# Altium PCB MICROPRESSURE.PcbDoc (part 2 of 2)
Units mm, origin at the board's own origin, x right, y up, seen from the top; angles counter-clockwise.
Board outline 100.09 x 99.96 mm, 2 copper layers (Top Layer, Bottom Layer), stack 1.58 mm thick; 120 components, 61 nets, 315 pads, 444 vias.
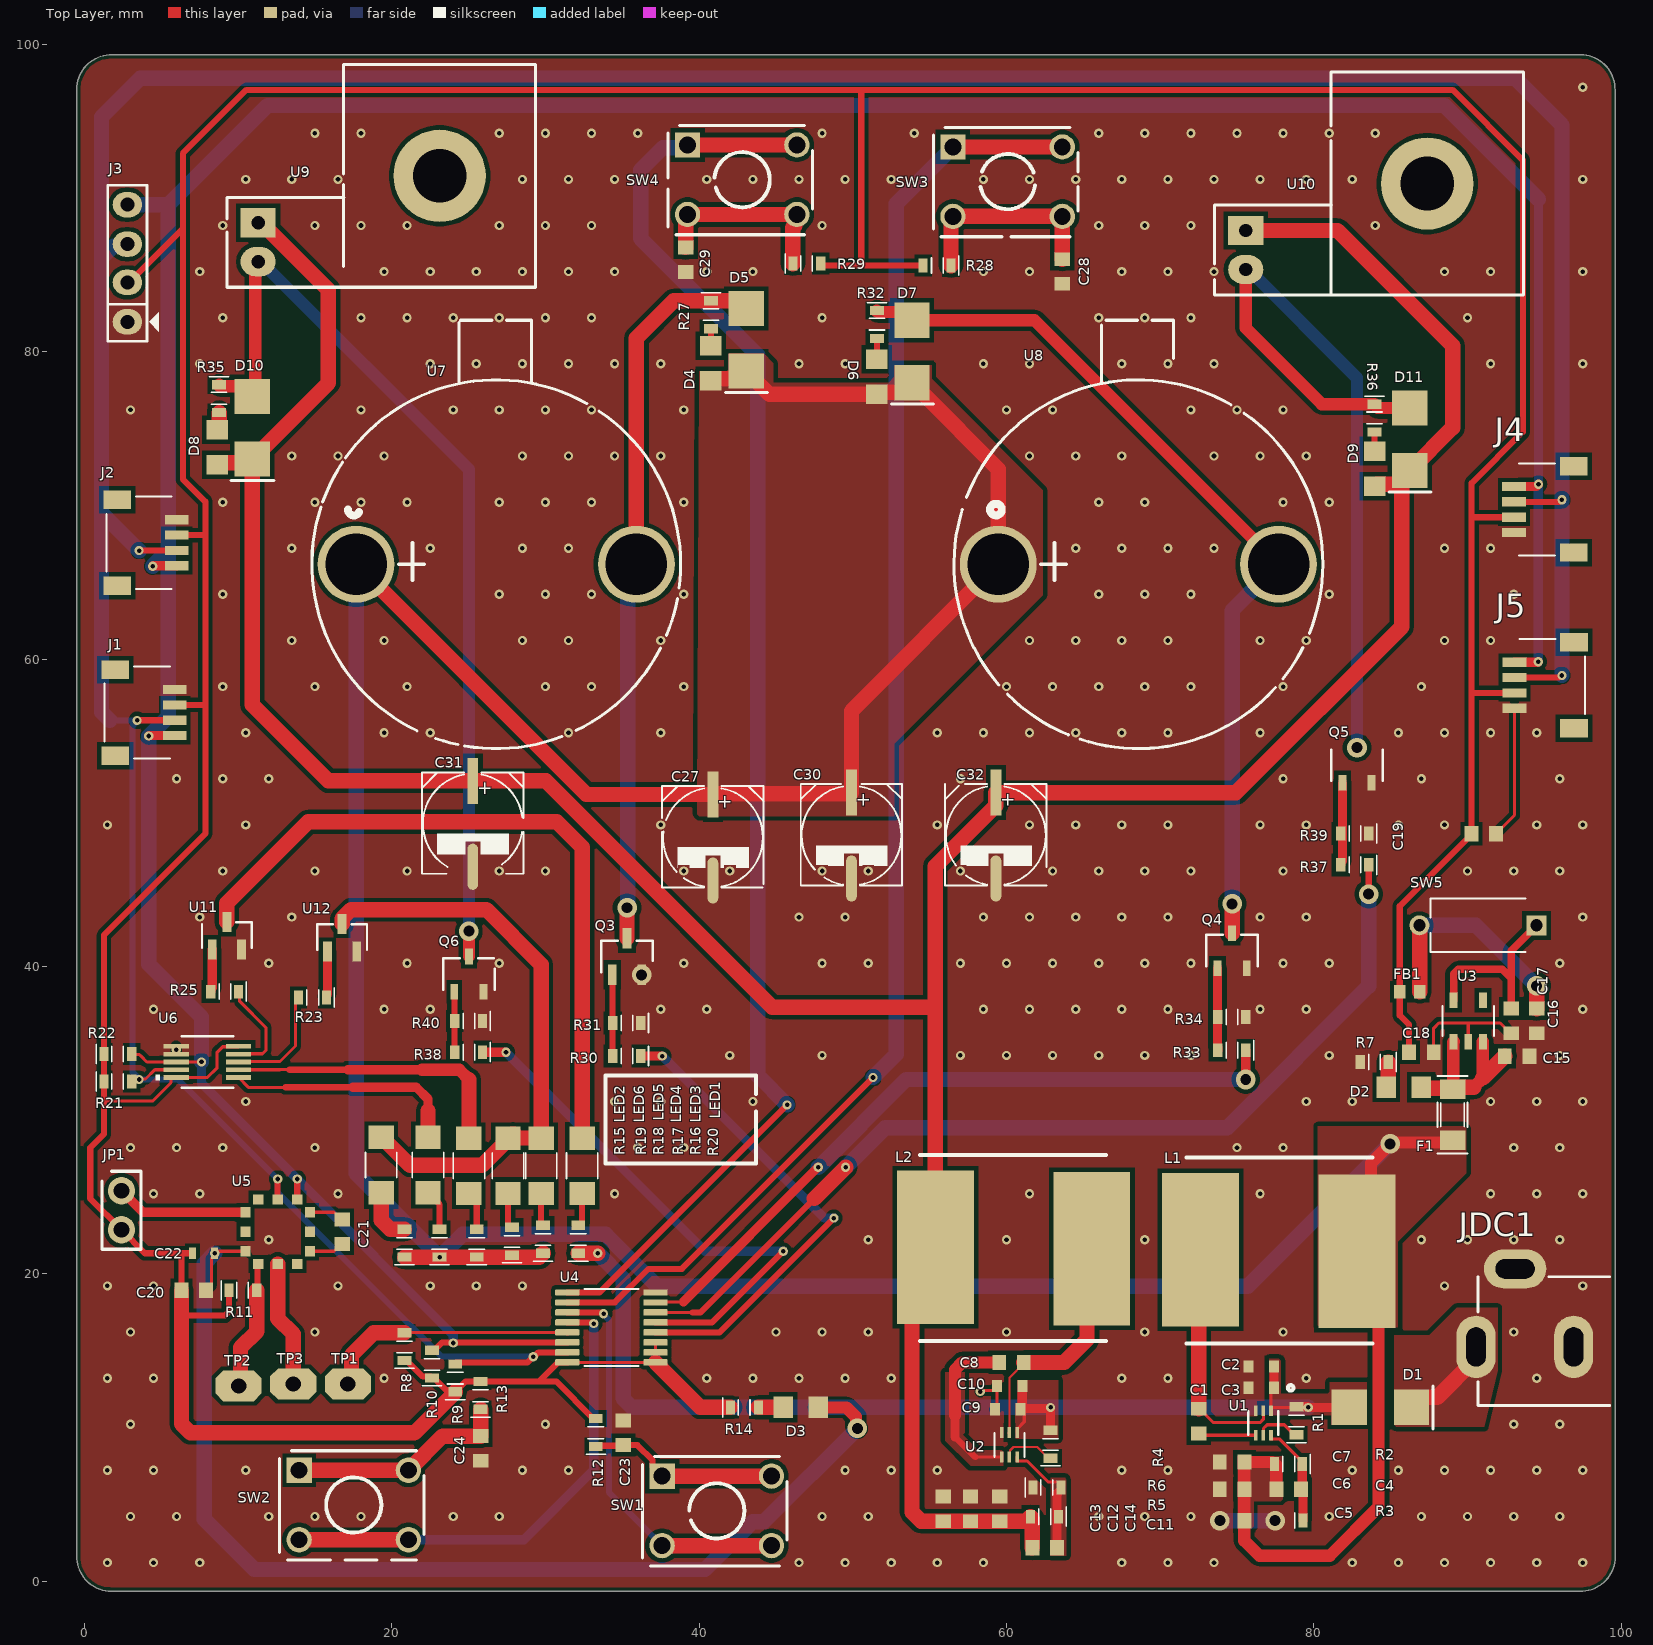
[diagram p0: Top Layer view]

## Via types
v1: diameter 0.6, hole 0.3, Top Layer to Bottom Layer, 432 vias
v2: diameter 1.27, hole 0.711, Top Layer to Bottom Layer, 12 vias

## Nets (pads, with @x,y where several pads share a name; then routed paths per layer and width w, separated by ;. In a path a pad name is that pad's centre, name@x,y a point inside that pad or via, vN(x,y) a via of type N, cw(c..) or ccw(c..) an arc to the next point about the centre after c; other vN are vias at no path point) (continued)
NetR33_1: (continued)
  Top Layer w0.6: 38.976,18.18 47.72,26.924 v1(47.752,26.924) ; v2(75.565,32.639) R33.1
  Bottom Layer w1: v1(47.752,26.924) 53.467,32.639 v2(75.565,32.639)
NetR37_1: R37.1 U4.6 | length 63.1
  Top Layer w0.2: U4.6 39.583,17.485
  Top Layer w0.4: 39.583,17.485 40.091,17.485 47.498,24.892 ; v2(83.566,44.704) R37.1
  Top Layer w1: 47.498,24.892 v1(49.53,26.924)
  Bottom Layer w1: v1(49.53,26.924) 52.105,29.499 74.355,29.499 83.566,38.71 v2(83.566,44.704)
NetR38_1: R38.1 U4.5 | length 35.1
  Top Layer w0.4: U4.5 40.838,16.835 v1(45.466,21.463)
  Top Layer w0.6: R38.1 v1(27.432,34.417)
  Bottom Layer w0.6: v1(27.432,34.417) 40.386,21.463 v1(45.466,21.463)
NetTP3_1: TP3.1 U5.8 | length 8.2
  Top Layer w1: U5.8 12.573,17.092 13.589,16.076 TP3.1
PUMP1_IN: C23.2 R12.1 SW1.1 SW1.2 U4.11 | length 38.7
  Top Layer w0.4: U4.11 33.642,17.485 33.728,17.399 v1(33.782,17.399) ; R12.1 33.319,8.807 35.007,8.807 C23.2 35.979,8.852 36.966,7.865 36.966,7.458 SW1.1@37.592,6.833
  Top Layer w1: SW1.2@37.592,2.311 SW1.2@44.704,2.311 ; SW1.1@37.592,6.833 SW1.1@44.704,6.833
  Bottom Layer w0.4: v1(33.782,17.399) 33.782,17.345 34.122,17.005 34.122,5.781 SW1.2@37.592,2.311
PUMP2_IN: C24.2 R13.1 SW2.1 SW2.2 U4.12 | length 46.8
  Top Layer w0.4: U4.12 33.013,16.835 33.093,16.755 v1(33.147,16.755)
  Top Layer w1: SW2.2@13.97,2.692 SW2.2@21.082,2.692 ; SW2.1@13.97,7.214 21.082,7.214 23.304,9.436 C24.2 R13.1
  Bottom Layer w0.6: SW2.2@21.082,2.692 28.6,2.692 33.147,7.239 v1(33.147,16.755)
RES: R11.2 TP2.1 U5.9 | length 8.5
  Top Layer w0.4: R11.2 11.258,18.968 11.258,20.588 U5.9
  Top Layer w1: TP2.1 10.158,12.825 10.158,15.2 11.214,16.256 R11.2
SCL: J1.4 J2.4 J3.4 J4.4 J5.4 R10.2 R22.2 U4.14 U5.3 U6.8 | length 232.7
  Top Layer w0.2: R22.2 3.117,34.259 3.587,34.259 3.668,34.178 4.064,33.782 U6.8 v1(7.62,33.782)
  Top Layer w0.4: U5.3 v1(13.843,26.162) ; R10.2 22.756,15.024 23.267,15.535 U4.14
  Top Layer w0.6: v1(4.191,54.991) 4.215,55.015 J1.4 ; v1(4.445,66.04) 4.469,66.064 J2.4 ; J5.4 94.577,59.793 v1(94.601,59.817) ; J4.4@93.308,71.229 94.47,71.229 v1(94.615,71.374)
  Bottom Layer w0.6: v1(7.62,33.782) 7.62,32.385 v1(13.843,26.162) 24.003,16.002 v1(24.003,15.494) ; v1(94.601,59.817) 94.601,71.36 v1(94.615,71.374) 94.615,89.916
  Bottom Layer w1: J3.4 5.461,89.56 ; v1(4.445,66.04) 5.461,67.056 ; v1(7.62,33.782) 7.62,36.703 4.191,40.132 v1(4.191,54.991) 5.461,56.261 5.461,67.056 ; 94.615,89.916 88.513,96.018 11.919,96.018 5.461,89.56 ; 5.461,67.056 5.461,89.56
SDA: J1.3 J2.3 J3.3 J4.3 J5.3 R9.2 R21.2 U4.15 U5.2 U6.9 | length 260.3
  Top Layer w0.2: R21.2 3.213,32.639 v1(3.556,32.639) 3.584,32.667 3.977,32.667 4.584,33.274 U6.9
  Top Layer w0.4: v1(3.429,56.007) 3.433,56.011 5.875,56.011 J1.3 ; v1(3.556,67.056) 3.56,67.06 6.002,67.06 J2.3 ; U5.2 v1(12.573,26.162) ; R9.2 24.23,14.235 28.84,14.235 v1(29.21,14.605) 29.264,14.605 29.544,14.885 U4.15 ; J5.3 93.058,58.797 95.954,58.797 96.085,58.928 v1(96.139,58.928) ; J4.3@93.312,70.227 95.954,70.227 96.085,70.358 v1(96.139,70.358)
  Bottom Layer w0.4: 1.651,56.007 v1(3.429,56.007) 3.429,55.953 3.134,55.658 3.134,33.115 3.556,32.693 v1(3.556,32.639) 6.096,32.639 v1(12.573,26.162) 12.573,25.273 23.241,14.605 v1(29.21,14.605)
  Bottom Layer w1: 1.651,56.007 1.111,56.547 1.111,69.501 ; J3.3 2.669,86.87 1.892,86.87 1.111,86.09 ; v1(3.556,67.056) 1.111,69.501 ; v1(96.139,58.928) v1(96.139,70.358) 96.139,94.742 93.091,97.79 3.634,97.79 1.111,95.268 1.111,86.09 ; 1.111,69.501 1.111,86.09
VALVE1_IN: C29.2 R29.1 SW4.1 SW4.2 U4.9 | length 107.6
  Top Layer w0.4: U4.9 33.517,18.785 v1(45.72,30.988)
  Top Layer w1: C29.2 39.118,86.781 39.118,88.801 39.243,88.925 46.355,88.925 46.23,88.801 46.23,88.198 46.101,88.068 R29.1 ; SW4.1@39.243,93.447 SW4.1@46.355,93.447
  Bottom Layer w1: SW4.1@39.243,93.447 39.068,93.272 37.646,93.272 36.195,91.821 36.195,87.376 43.815,79.756 43.815,32.893 v1(45.72,30.988)
VALVE2_IN: C28.2 R28.1 SW3.1 SW3.2 U4.10 | length 108.9
  Top Layer w0.4: U4.10 34.518,18.135 36.703,20.32 38.862,20.32 v1(51.308,32.766)
  Top Layer w1: R28.1 56.388,86.495 56.39,86.498 56.39,88.674 56.515,88.798 63.627,88.798 C28.2 ; SW3.1@56.515,93.32 SW3.1@63.627,93.32
  Bottom Layer w1: v1(51.308,32.766) 52.832,34.29 52.832,89.637 SW3.1@56.515,93.32
VIN: C2.2 C3.2 C9.2 C10.2 D1.2 R1.2 R4.2 R20.1 U1.1 U2.1 | length 71
  Top Layer w0.2: U2.1 60.69,9.899 61.153,10.362 C9.2@61.153,11.176 ; U1.1 77.208,12.372 C3.2 ; U1.1@77.223,11.303 R1.2@79.055,11.303
  Top Layer w0.6: C9.2 60.899,11.248 61.026,11.375 C10.2 ; C9.2@61.153,11.212 61.181,11.239 62.801,11.239 v1(62.865,11.303) R4.2 ; C3.2 C2.2 ; R1.2 79.591,11.341 v1(79.629,11.303) ; v1@79.591,11.303 v1(79.629,11.303) ; D1.2 v1(79.629,11.303)
  Top Layer w1: R20.1 v1(33.401,21.336)
  Bottom Layer w1: v1(33.401,21.336) 35.052,19.685 35.052,11.889 35.638,11.303 v1(62.865,11.303) v1(79.629,11.303)
pads on no net: J1.S1 J1.S2 J2.S1 J2.S2 J4.S1 J4.S2 J5.S1 J5.S2 U3.4 U5.1 U5.5 U5.7 U5.11 U9.3 U10.3

## Polygon pours and split planes (outlines as drawn)
GND on Top Layer "GND_L01_P008" (solid, remove dead copper, pour order 8): 0,102.489 0.635,101.854 103.124,101.854 103.124,-5.461 102.235,-6.35 101.854,-5.969 -5.334,-5.969 -5.334,99.06 -3.175,101.219
4V5 on Top Layer "4V5_L01_P007" (solid, remove dead copper, pour order 7): 40.005,78.74 41.783,78.74 41.91,78.867 41.91,79.883 44.196,79.883 44.831,79.248 44.831,77.978 52.324,77.978 52.705,78.359 52.705,79.248 52.832,79.121 55.118,79.121 55.118,78.232 62.357,70.993 62.357,64.135 52.705,54.483 52.705,49.784 40.005,49.784 39.878,49.911
NetC11_1 on Top Layer "NETC11_1_L01_P006" (solid, remove dead copper, pour order 6): 62.865,1.651 62.865,1.766 62.865,1.905 62.865,6.731 64.008,6.731 63.881,6.604 63.881,1.651
NetC8_2 on Top Layer "NETC8_2_L01_P005" (solid, remove dead copper, pour order 5): 59.817,8.382 59.69,8.509 58.166,8.509 57.15,9.525 57.277,9.652 57.277,13.589 56.007,13.589 56.007,9.144 57.658,7.493 59.817,7.493
4V5 on Top Layer "4V5_L01_P004" (solid, remove dead copper, pour order 4): 89.916,29.464 89.789,29.591 80.264,29.591 80.264,16.637 80.391,16.51 85.471,16.51 85.471,22.098 89.916,26.543
VIN on Top Layer "VIN_L01_P003" (solid, remove dead copper, pour order 3): 60.706,13.081 60.706,11.557 60.579,11.557 60.579,9.271 63.373,9.271 63.373,13.081
+12 on Top Layer "+12_L01_P002" (solid, remove dead copper, pour order 2): 91.948,13.716 91.948,13.97 91.948,17.78 89.281,17.78 87.503,16.002 85.217,16.002 85.217,10.16 85.344,10.033 91.078,10.033
4V5 on Top Layer "4V5_L01_P001" (solid, remove dead copper, pour order 1): 77.978,8.128 75.057,8.128 75.057,3.429 75.946,3.429 76.073,3.556 76.073,5.207 77.851,5.207 77.978,5.334
VIN on Top Layer "VIN_L01_P000" (solid, pour order 0): 83.439,10.16 81.153,10.16 81.153,10.795 77.089,10.795 77.089,14.478 77.724,14.478 77.851,14.351 77.851,12.192 80.899,12.192 81.026,12.319 81.026,12.954 83.439,12.954
GND on Bottom Layer "GND_L02_P009" (solid, remove dead copper, pour order 9): 0.762,103.759 108.077,103.759 108.077,-8.763 105.918,-10.922 -7.239,-10.922 -7.239,95.758

## Other copper
Bottom Layer:
  region: 35.56,18.034
  region: 35.56,18.034

## Silkscreen, mask and mechanical layers (free items; w line width, h text height)
Top Overlay:
  circle w0.254: c78.486,12.573 r0.18
  lines w0.254: 43.688,30.56 43.688,27.178 33.909,27.178 33.909,32.893 43.688,32.893 43.688,31.7

## Text inside footprints (layer, text, board x,y; h text height)
C27: Top Overlay "+" at 41.296,51.187 h0.89 r270
C30: Top Overlay "+" at 50.313,51.314 h0.89 r270
C31: Top Overlay "+" at 25.675,52.076 h0.89 r270
C32: Top Overlay "+" at 59.711,51.314 h0.89 r270
U3: Top Assembly "*" at 89.804,35.535 h1.27 r90
U6: Top Assembly "*" at 9.487,33.579 h1.27 r180